# Altium PCB fmc-5pof.PcbDoc (part 2 of 2)
Units mm, origin at the board's own origin, x right, y up, seen from the top; angles counter-clockwise.
Board outline 76.75 x 69 mm, 2 copper layers (Top Layer, Bottom Layer); 109 components, 129 nets, 446 pads, 85 vias.
Unrouted connection lines stored in the file: 1.
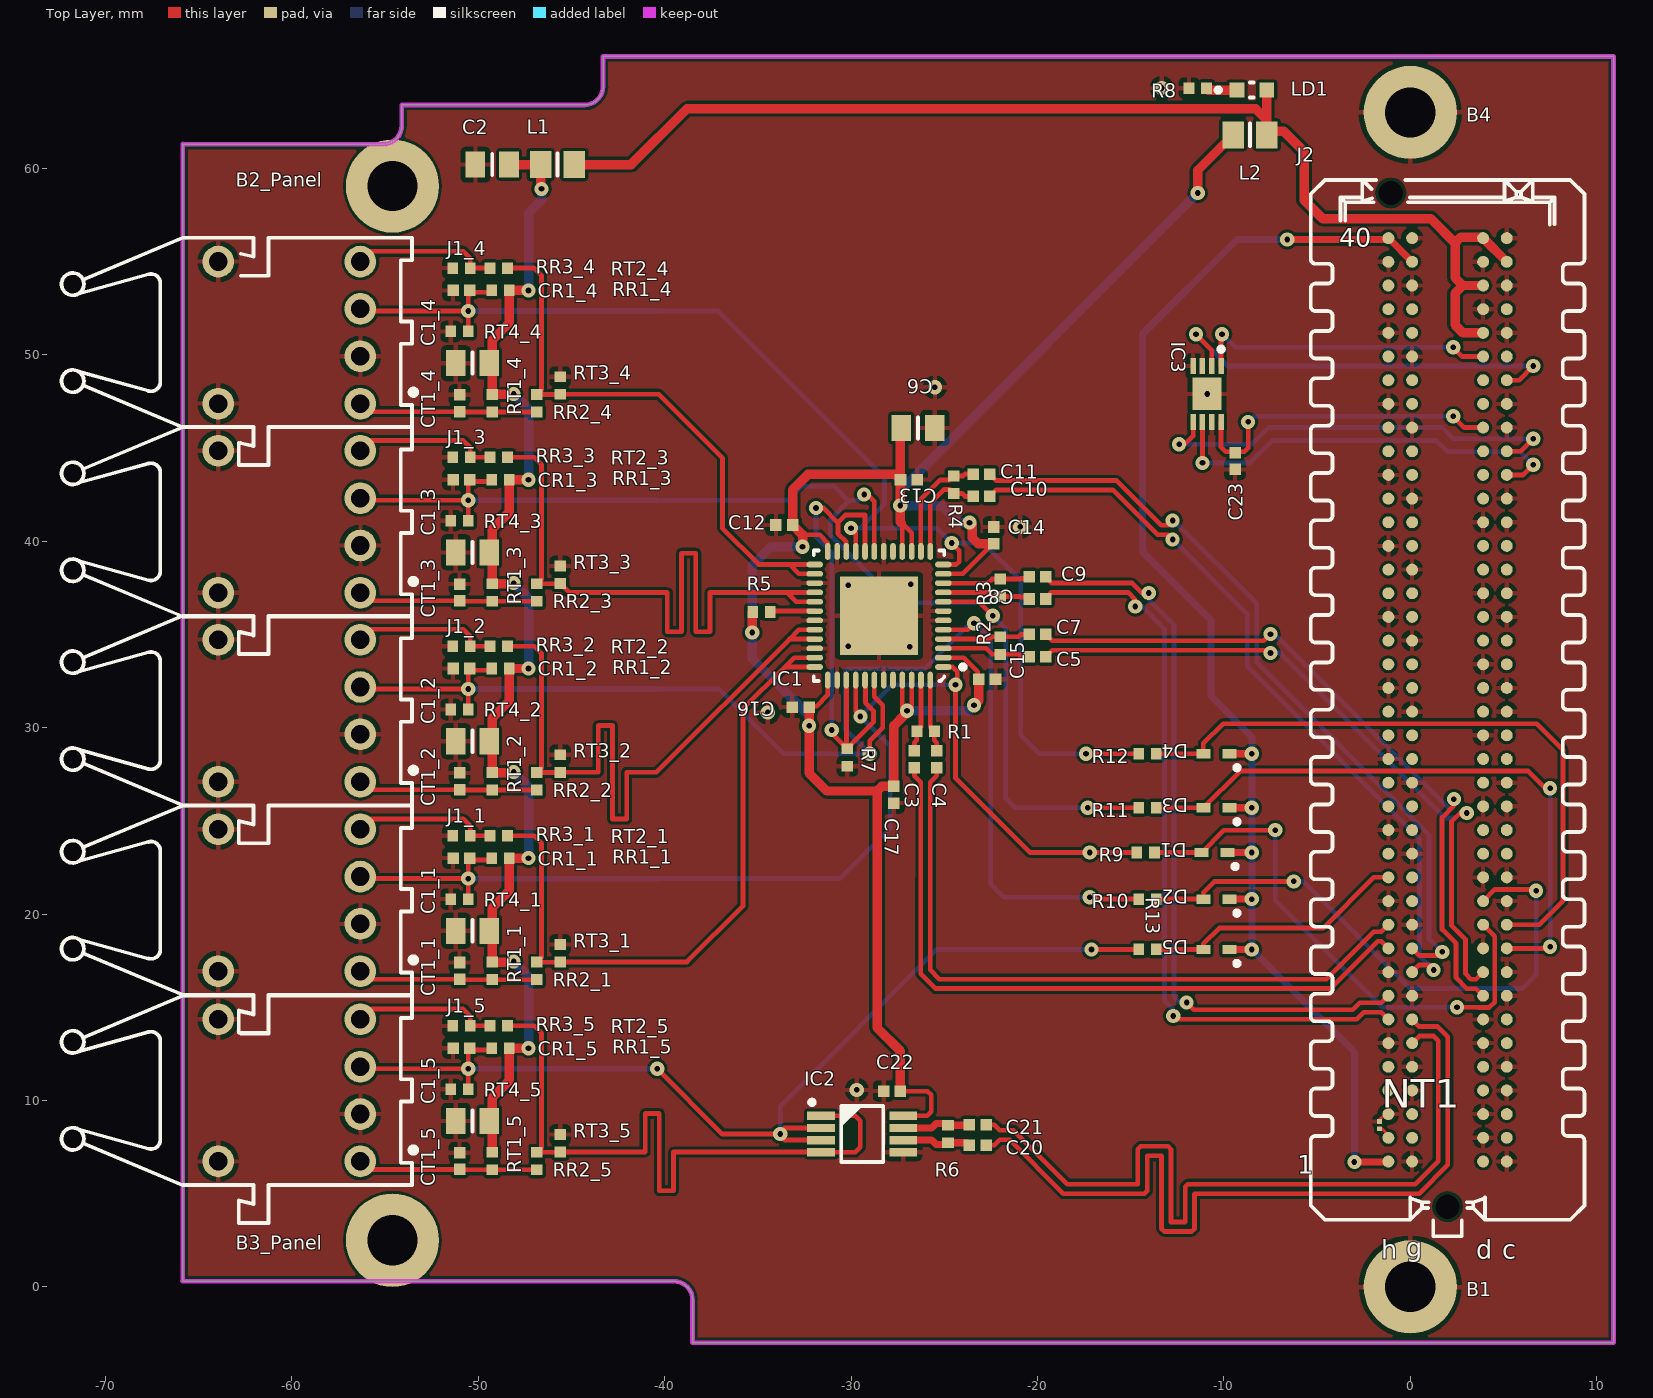
[diagram p0: Top Layer view]

## Keep-outs (continued)
Keep-Out Layer: (continued)
  lines w0.254: -65.856,0.3 -39.5,0.3 cw(c-39.5,-0.7) -38.5,-0.7 -38.5,-3 10.894,-3 ; -65.852,61.296 -55.106,61.296 ; -65.85,0.3 -65.85,61.3 ; -55.1,61.3 ccw(c-55.1,62.3) -54.1,62.3 -54.1,63.4 -44.3,63.4 ccw(c-44.3,64.4) -43.3,64.4 -43.3,66 ; -43.281,66 10.9,66 10.9,-3

## Text inside footprints (layer, text, board x,y; h text height)
J2: Top Overlay "1" at -6.073,6.074 h1; Top Overlay "40" at -3.8,55.791 h1; Top Overlay "g" at -0.231,1.629 h1; Top Overlay "h" at -1.556,1.519 h1; Top Overlay "c" at 4.921,1.519 h1; Top Overlay "d" at 3.545,1.502 h1; Mechanical 14 "1" at -6.073,6.074 h1; Mechanical 14 "g" at -0.231,1.629 h1; Mechanical 14 "d" at 3.545,1.502 h1; Mechanical 14 "c" at 4.921,1.519 h1